# EAGLE board switch_eval_box_redo_v1 (EAGLE 9.6.2)

Size 54.55 x 48.55 mm. Coordinates in mm from the lower left corner, seen from the top.
Outline: 45.55,47.27 45.55,48.27 arc90 45.27,48.55 17.27,48.55 arc90 17,48.27 17,47.27 arc-90 9.28,39.55 0.28,39.55 arc90 0,39.27 0,9.28 arc90 0.28,9 1.27,9 arc-90 9,1.27 9,0.28 arc90 9.28,0 37.27,0 arc90 37.55,0.28 37.55,1.27 arc-90 45.27,9 54.27,9 arc90 54.55,9.28 54.55,39.27 arc90 54.27,39.55 53.27,39.55 arc-90 45.55,47.27
Outline: circle at 43.28,44.28 radius 1.75
Outline: circle at 11.28,4.28 radius 1.75
Copper layers (1*16): Top 0.035mm / dielectric 1.5mm / Bottom 0.035mm
Design rules "default": minimum track width 6mil, minimum drill 0.35mm, track to track 6mil, track to pad 6mil, pad to pad 6mil, via to via 6mil, smd to smd 6mil, copper to edge 40mil, drill to drill 6mil, minimum pad ring 10mil, minimum via ring 8mil, stop-mask expansion 4mil, vias tented up to drill 0mil, thermal gap 10mil

## Footprints (pad centres in the part's own frame; a part is rotated, then mirrored left to right if it is on the bottom)
C0603 = smd 1.1 x 1: 1 -0.85,0; 2 0.85,0
SOT95P280X145-6N = smd 1.2 x 0.6: 1 -1.25,0.95; 2 -1.25,0; 3 -1.25,-0.95; 4 1.25,-0.95; 5 1.25,0; 6 1.25,0.95
DG983-1 = smd 0.66 x 0.31: 1 -1.775,1; 2 -1.775,0.5; 3 -1.775,0; 4 -1.775,-0.5; 5 -1.775,-1; 11 1.775,-1; 12 1.775,-0.5; 13 1.775,0; 14 1.775,0.5; 15 1.775,1 | smd 0.31 x 0.66: 6 -1,-1.775; 7 -0.5,-1.775; 8 0,-1.775; 9 0.5,-1.775; 10 1,-1.775; 16 1,1.775; 17 0.5,1.775; 18 0,1.775; 19 -0.5,1.775; 20 -1,1.775 | smd 1.78 x 1.78: X 0,0
SOT95P280X145-5N = smd 1.25 x 0.6: 1 -1.25,0.95; 2 -1.25,0; 3 -1.25,-0.95; 4 1.25,-0.95; 5 1.25,0.95
SHDR2W90P0X254_1X2_493X635X106 = drill 1.1 pad 1.65 square: 1 0,0 | drill 1.1 pad 1.65: 2 2.54,0
M207830246 = drill 0.94 pad 1.462: 1 -1.27,-1.27; 2 -1.27,1.27; 3 1.27,-1.27; 4 1.27,1.27
R0603 = smd 1 x 1.1: 1 -0.85,0; 2 0.85,0
J502-ND-142-0701-801/806 = smd 5.08 x 2.286: 1 2.565,0; G@1 2.565,4.42; G@2 2.565,-4.42 | smd 5.08 x 2.286 bottom: G@3 2.565,4.42; G@4 2.565,-4.42

## Placement (x,y rotation side)
C1  100e-12  [C0603]  41.91,30.48 0 top
C2  100e-12  [C0603]  41.91,38.1 0 top
C3  1e-6  [C0603]  91.44,40.64 0 top  (outside the outline)
C4  0.01e-6  [C0603]  80.01,20.32 0 top  (outside the outline)
C5  3.3e-6  [C0603]  71.12,40.64 0 top  (outside the outline)
C6  100e-12  [C0603]  67.31,31.75 0 top  (outside the outline)
IC1  SN74LVC2G17DBVT  [SOT95P280X145-6N]  35.56,34.29 0 top
IC2  HSWA2-30DR+  [DG983-1]  26.67,24.13 0 top
IC4  MAX8878EUK28+T  [SOT95P280X145-5N]  19.05,40.64 0 top
J1  171856-0002  [SHDR2W90P0X254_1X2_493X635X106]  10.16,34.29 90 top
J2  M20-7830246  [M207830246]  35.56,44.45 0 top
R1  10e3  [R0603]  41.91,35.56 0 top
R2  10e3  [R0603]  41.91,33.02 0 top
R3  10e6  [R0603]  27.94,46.99 0 top
R4  1e6  [R0603]  27.94,44.45 0 top
R5  1e6  [R0603]  27.94,41.91 0 top
R6  10e6  [R0603]  27.94,39.37 0 top
X1  SMA-142-0701-801/806  [J502-ND-142-0701-801/806]  54.61,24.13 180 top
X2  SMA-142-0701-801/806  [J502-ND-142-0701-801/806]  -1.27,24.13 0 top
X3  SMA-142-0701-801/806  [J502-ND-142-0701-801/806]  26.67,0 90 top

## Library data of the parts
C1-C6 = rcl; SPICEPREFIX: C
IC1 = SN74LVC2G17DBVT; DESCRIPTION: DUAL SCHMITT-TRIGGER BUFFER; HEIGHT: 1.45mm; MANUFACTURER_NAME: Texas Instruments; MANUFACTURER_PART_NUMBER: SN74LVC2G17DBVT; MOUSER_PART_NUMBER: 595-SN74LVC2G17DBVT; MOUSER_PRICE-STOCK: https://www.mouser.com/Search/Refine.aspx?Keyword=595-SN74LVC2G17DBVT; RS_PART_NUMBER: 6628944P; RS_PRICE-STOCK: http://uk.rs-online.com/web/p/products/6628944P
IC2 = minicircuits; OC_FARNELL: unknown; OC_NEWARK: unknown
IC4 = MAX8878EUK28+T; DESCRIPTION: LDO Voltage Regulators Low-Noise, Low-Dropout, 150mA Linear Regulators with 2982 Pinout; HEIGHT: 1.45mm; MANUFACTURER_NAME: Maxim Integrated; MANUFACTURER_PART_NUMBER: MAX8878EUK28+T
J1 = 171856-0002; ALLIED_NUMBER: 70314268; ALLIED_PRICE-STOCK: https://www.alliedelec.com/molexincorporated-171856-0002/70314268/; DESCRIPTION: KK 254 RPC Pin Header friction lock 2way Molex KK 254 Series, Series Number 171856, 2.54mm Pitch 2 Way 1 Row Straight PCB Header, Through Hole; HEIGHT: 10.61mm; MANUFACTURER_NAME: Molex; MANUFACTURER_PART_NUMBER: 171856-0002; MOUSER_PART_NUMBER: 538-171856-0002; MOUSER_PRICE-STOCK: https://www.mouser.com/Search/Refine.aspx?Keyword=538-171856-0002; RS_PART_NUMBER: 7922884P; RS_PRICE-STOCK: http://uk.rs-online.com/web/p/products/7922884P
J2 = M20-7830246; ALLIED_NUMBER: R1052762; ALLIED_PRICE-STOCK: https://www.alliedelec.com/harwin-m20-7830246/R1052762/; DESCRIPTION: HARWIN 2.54mm 4 Way 2 Row Straight PCB Socket Through Hole Socket Strip; HEIGHT: 8.65mm; MANUFACTURER_NAME: HARWIN; MANUFACTURER_PART_NUMBER: M20-7830246; MOUSER_PART_NUMBER: 855-M20-7830246; MOUSER_PRICE-STOCK: https://www.mouser.com/Search/Refine.aspx?Keyword=855-M20-7830246; RS_PART_NUMBER: 6816839P; RS_PRICE-STOCK: http://uk.rs-online.com/web/p/products/6816839P
R1-R6 = rcl; SPICEPREFIX: R
X1-X3 = con-coax; MF: JOHNSON COMPONENTS; MPN: 142-0701-801; OC_FARNELL: 1608592; OC_NEWARK: 90F2624

## Nets
GND: C1.1 C2.2 C3.2 C4.2 C5.2 C6.2 IC1.2 IC2.1 IC2.2 IC2.4 IC2.5 IC2.6 IC2.7 IC2.9 IC2.10 IC2.11 IC2.12 IC2.14 IC2.15 IC2.18 IC2.19 IC2.X IC4.2 J1.2 J2.1 J2.2 R1.2 R2.2 R3.1 R6.1 X1.G@1 X1.G@2 X1.G@3 X1.G@4 X2.G@1 X2.G@2 X2.G@3 X2.G@4 X3.G@1 X3.G@2 X3.G@3 X3.G@4
N$1: IC1.3 J2.3 R3.2 R4.2
N$2: C3.1 IC4.1 IC4.3 J1.1
N$3: C4.1 IC4.4
N$4: IC1.1 J2.4 R5.2 R6.2
N$7: C5.1 C6.1 IC1.5 IC2.20 IC4.5 R4.1 R5.1
N$8: IC2.3 X3.1
N$9: C2.1 IC1.6 IC2.17 R1.1
N$10: IC2.13 X1.1
N$11: C1.2 IC1.4 IC2.16 R2.1
N$12: IC2.8 X2.1

## Tracks (layer width: path | path; a pad name or v marks a point on that pad's centre or on a via)
GND  (41 unrouted)
N$1  (3 unrouted)
N$2  (3 unrouted)
N$3  (1 unrouted)
N$4  (3 unrouted)
N$7  (6 unrouted)
N$8  (1 unrouted)
N$9  (3 unrouted)
N$10  (1 unrouted)
N$11  (3 unrouted)
N$12  (1 unrouted)